# Altium PCB 06002479宁波2号线二期车载PIS系统_功率放大器功放板2  BHC-A-2030-04_PCB V1.0.PcbDoc (part 2 of 2)
Units mil, origin at the board's own origin, x right, y up, seen from the top; angles counter-clockwise.
Board outline 6377.95 x 3937.01 mil, 2 copper layers (Top Layer, Bottom Layer); 141 components, 101 nets, 406 pads, 71 vias.
Unrouted connection lines stored in the file: 3.
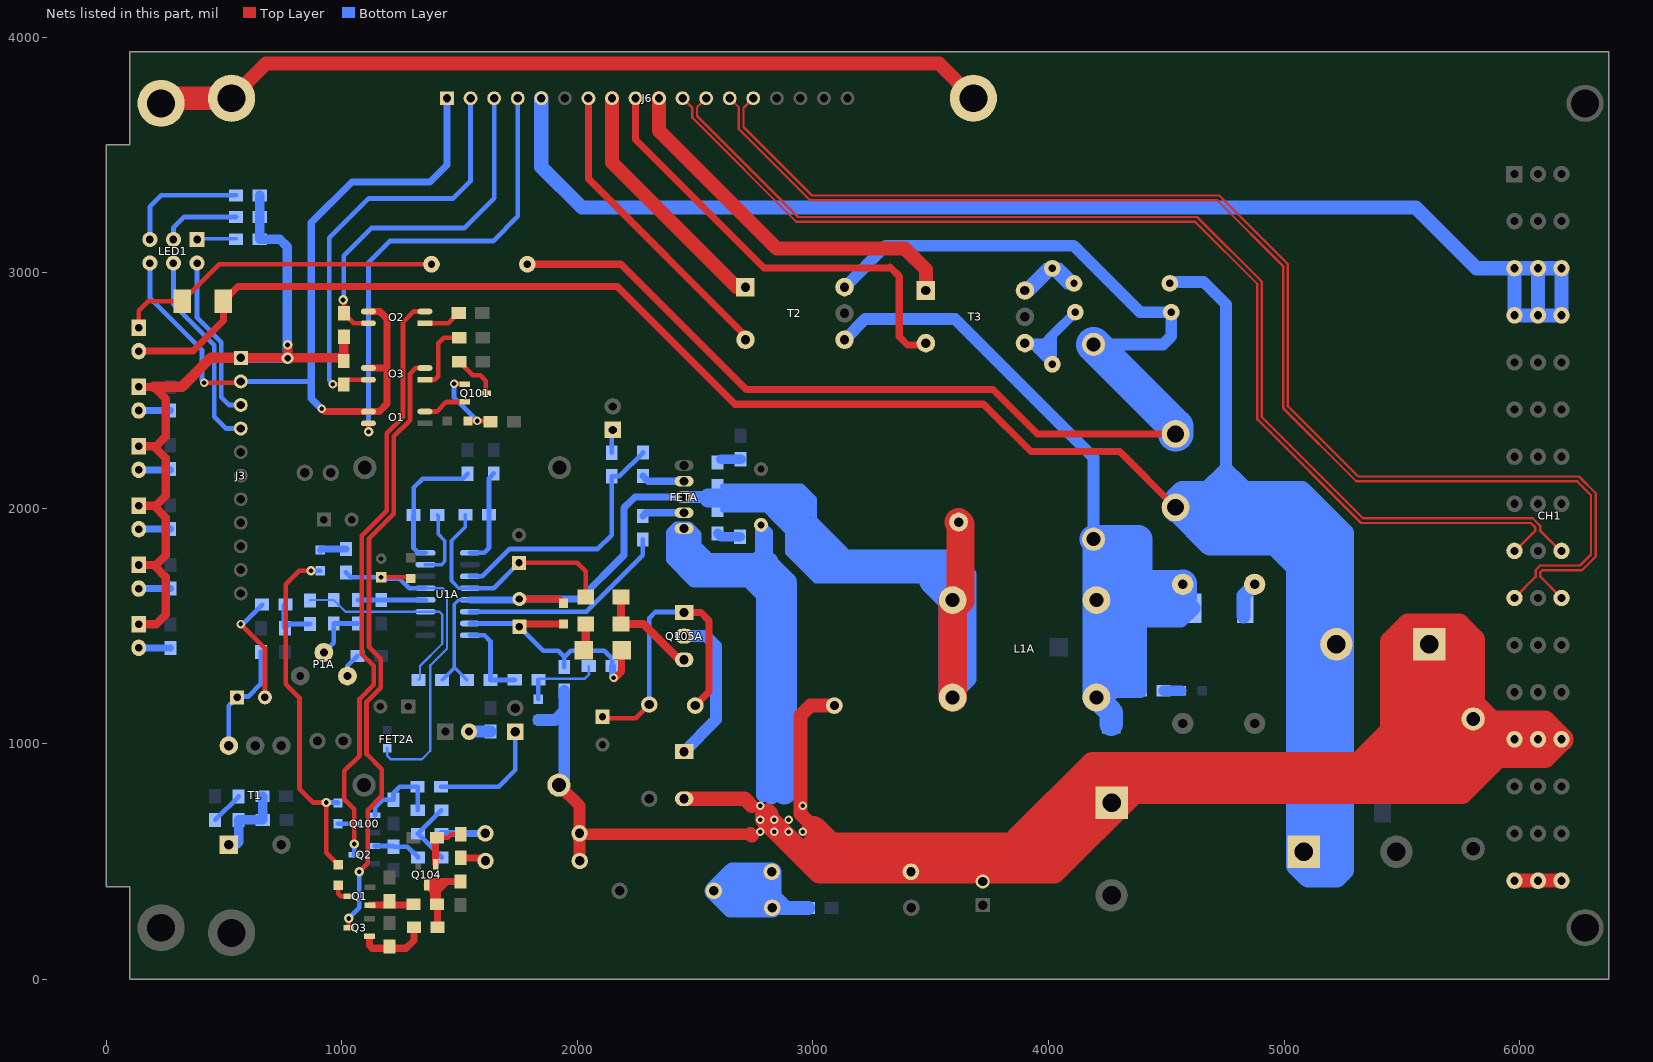
[diagram p2: the nets of this part, all layers, seen from the top]

## Via types
v1: diameter 40, hole 20, Top Layer to Bottom Layer, 48 vias
v2: diameter 36, hole 20, Top Layer to Bottom Layer, 19 vias
v3: diameter 50, hole 28, Top Layer to Bottom Layer, 3 vias
v4: diameter 30, hole 18, Top Layer to Bottom Layer, 1 vias

## Nets (pads, with @x,y where several pads share a name; then routed paths per layer and width w, separated by ;. In a path a pad name is that pad's centre, name@x,y a point inside that pad or via, vN(x,y) a via of type N, cw(c..) or ccw(c..) an arc to the next point about the centre after c; other vN are vias at no path point) (continued)
DC110V: C9A.2 C11A.2 CH1.B26 CH1.D26 CH1.Z26 CP8A.1 CP9.1 D4A.2 D5A.2 D22.1 FETA.5 J2.2 R17A.2 R114A.2 R115A.2 R116.2 R117A.2 R_1/2_1.2 Z100.2 Z101.2 | length 26253.6
  Top Layer w50: R117A.2@1921.2,824.26 2008.85,736.61 Z100.2@2008.85,619.27 Z101.2@2008.85,503.27 ; Z100.2@2012.76,615.35 2735.04,615.35 ; 3885.83,614.17 3993.59,614.17 3999.59,614.17 4003.73,618.31
  Top Layer w60: R114A.2@2452.76,766.14 2710.24,766.14 2740.16,736.22 ; 2735.04,615.35 2740.16,610.24 ; 3004.06,644 2947,701.06 2947,1120 2989,1162 R115A.2@3091,1162
  Top Layer w100: 2803.15,696.85 2803.15,681.1 3028.24,456.01 R_1/2_1.2@3415.98,456.01 ; 3003.94,572.01 3076.05,572.01 ; 3004.06,644 3076.05,572.01 ; 3018.13,526.01 3122.05,526.01 ; 3415.98,526.01 3122.05,526.01 ; R_1/2_1.2@3417.98,456.01 3944.43,456.01 ; 3494.43,526.01 3644.43,526.01 ; 4045,694 4126,775 ; CP8A.1@4206.92,718.51 3944.43,456.01 ; 3076.05,572.01 3644.43,572.01 ; 3076.05,572.01 3122.05,526.01 ; 3644.43,526.01 3644.43,572.01 ; 3644.43,526.01 3911.43,526.01 3999.59,614.17 4180.42,795 4362.2,795 ; 3644.43,572.01 3843.66,572.01 ; 3843.66,572.01 3885.83,614.17 4186.65,915 5318,915 5457,1054 5457,1130 ; 3843.66,572.01 3951.43,572.01 3993.59,614.17 4241.62,862.2 5302.8,862.2 5330,835 5529,1034 ; 3944.43,456.01 4023.21,456.01 4362.2,795 ; 4362.2,795 5395,795 ; 5395,795 5445.5,845.5 ; 5395,795 5496,795 ; 5445.5,845.5 5457,857 ; 5445.5,845.5 5434,857 5457,857 ; 5445.5,845.5 5496,795 ; 5457,857 5529,929 5529,1034 ; 5457,857 5667,857 5591,933 5591,1130 ; 5457,1130 5529,1130 ; 5457,1130 5529,1202 ; 5457,1130 5457,1433 5527,1503 5741,1503 5803,1441 5803,1358 ; 5496,795 5623,795 ; 5529,1034 5529,1130 ; 5529,1130 5529,1202 ; 5529,1130 5591,1130 ; 5529,1202 5583.5,1256.5 ; 5529,1202 5529,1379 ; 5529,1379 5529,1501 CP9.1@5618,1412 ; 5529,1379 5550,1358 CP9.1@5591,1358 ; 5583.5,1256.5 5568,1272 5591,1272 ; 5583.5,1256.5 5591,1249 ; 5583.5,1256.5 5591,1264 ; 5591,1130 5659,1130 ; 5591,1130 5591,1249 ; 5591,1249 5662,1178 ; 5591,1249 5591,1264 ; 5591,1264 5599,1272 ; 5591,1264 5591,1272 ; 5591,1272 CP9.1@5591,1358 ; 5591,1272 5599,1272 ; CP9.1@5591,1358 5731,1358 ; CP9.1@5591,1358 5591,1385 CP9.1@5618,1412 ; 5599,1272 5601,1274 5719,1274 ; 5599,1272 5717,1272 5719,1274 ; CP9.1@5618,1412 5723,1412 5731,1404 5731,1358 ; 5623,795 5731,795 ; 5623,795 5731,903 ; 5659,1130 5731,1058 ; 5659,1130 5659,975 5731,903 ; 5659,1130 5659,1175 5662,1178 ; 5659,1130 5710,1130 5662,1178 ; 5662,1178 5731,1247 ; 5719,1274 5731,1286 ; 5719,1274 5731,1274 ; 5731,795 5754.45,795 5906.89,947.44 ; 5731,795 5731,903 ; 5731,903 5731,1058 ; 5731,903 5777.93,903 5891.46,1016.54 ; 5731,1058 5772.46,1016.54 5891.46,1016.54 ; 5731,1058 5731,1247 ; 5731,1247 5731,1274 ; 5731,1274 5731,1286 ; 5731,1286 5731,1358 ; 5731,1286 5803,1358 ; 5731,1358 5803,1358 ; 5803,1169.29 5803,1358 ; 5803,1169.29 D22.1@5803,1105 5891.46,1016.54 ; 5803,1169.29 5881.74,1090.55 6105.91,1090.55 CH1.Z26@6177.95,1018.51 ; 5891.46,1016.54 CH1.D26@5975.99,1016.54 ; 5906.89,947.44 CH1.D26@5975.99,1016.54 ; 5906.89,947.44 6106.89,947.44 CH1.Z26@6175.99,1016.54 ; CH1.D26@5975.99,1016.54 CH1.Z26@6175.99,1016.54 ; CH1.D26@5975.99,1016.54 CH1.D26@5977.95,1018.51 CH1.B26@6077.95,1018.51 CH1.Z26@6177.95,1018.51 ; CH1.Z26@6175.99,1016.54 CH1.Z26@6177.95,1018.51 ; CH1.Z26@6175.99,1016.54 6177.95,1016.54 CH1.Z26@6177.95,1018.51
  Bottom Layer w40: C11A.2@2779.53,1929.13 2811.02,1897.64 2811.02,1788.41 2820.94,1778.5
  Bottom Layer w50: D4A.2@1833.82,1100.62 1905.2,1100.62 1943.8,1139.21 ; R117A.2@1921.2,824.26 1943.8,846.86 1943.8,1139.21 ; R17A.2@1943.8,1224.94 1943.8,1139.21 ; 2779.53,1778.5 C11A.2@2779.53,1929.13
  Bottom Layer w60: 2787.4,783.46 2787.4,1629.92 2724.41,1692.91 2496.06,1692.91 2405.51,1783.46 2405.51,1893.7 2425.2,1913.39 FETA.5@2452.76,1913.39 2468.5,1913.39 2496.06,1885.83 2496.06,1838.58 2556.15,1778.5 C9A.2@2690.36,1778.5 2779.53,1778.5 2785.76,1778.5 2820.94,1778.5 2820.94,1743.32 2820.94,1720.47 2820.94,876.06 2839.85,857.15 ; 2822.83,771.65 2839.85,788.67 2839.85,857.15 ; 2839.85,1724.41 2839.85,857.15
  Bottom Layer w70: R116.2@5532.83,1236 5532.83,1338.98 CP9.1@5615.85,1422
  Bottom Layer w80: D5A.2@4267,885.15 4267.43,884.72 CP8A.1@4267.43,749.86
  Bottom Layer w100: 2452.76,1858.27 2452.76,1842.52 2440.94,1830.71 2440.94,1818.9 2535.43,1724.41 2669.29,1724.41 2673.23,1720.47 2820.94,1720.47 ; 2785.76,1778.5 2820.94,1743.32 2839.85,1724.41 2881.89,1682.37 2881.89,899.19 ; 2839.85,857.15 2881.89,899.19 ; 2877.95,791.34 2881.89,795.28 2881.89,899.19
  other v2: 2775.59,625.98 2835.96,625.98 2896.33,625.98 2956.69,625.98 2775.59,677.17 2835.96,677.17 2896.33,677.17 2775.59,736.22 2956.69,736.22
DC+3.3V: J3.1 LED3.1 LED4.1 LED5.1 LED6.1 LED7.1 R67.2 R69.2 R72.2 R118.1 R121.1 | length 3806.7
  Top Layer w35: LED7.1@137.8,1506.69 211.42,1506.69 251.97,1547.24 251.97,1708.66 201.97,1758.66 LED6.1@137.8,1758.66 211.42,1758.66 251.97,1799.21 251.97,1960.63 201.97,2010.63 LED5.1@137.8,2010.63 211.42,2010.63 251.97,2051.18 251.97,2212.6 201.97,2262.6 LED4.1@137.8,2262.6 211.42,2262.6 251.97,2303.15 251.97,2464.57 201.97,2514.57 LED3.1@137.8,2514.57
  Top Layer w40: J3.1@570.87,2637.8 v3@769.39,2637.8 ; v3(769.39,2636.74) v3@769.39,2637.8 ; v1(769.39,2692.91) v3@769.39,2637.8 ; R118.1@1008.8,2727.33 1008.06,2726.59 1008.06,2650.91 R121.1@1008.06,2624.68 994.94,2637.8 v3@769.39,2637.8
  Top Layer w45: 201.97,2514.57 320,2514.57 443.23,2637.8 527.56,2637.8 J3.1@570.87,2637.8 ; R121.1@994.94,2637.8 R121.1@1008.06,2650.91
  Bottom Layer w40: J3.1@570.87,2637.8 571.92,2636.74 697.91,2636.74 ; R72.2@651.18,3141.73 736.22,3141.73 767.39,3110.57 v3@767.39,2636.74 ; R72.2@651.57,3144.47 R67.2@651.57,3327.47 ; v3(769.39,2636.74) v3@767.39,2636.74 ; 697.91,2636.74 v3@767.39,2636.74 ; 697.91,2636.74 696.85,2637.8 766.33,2637.8 v3@767.39,2636.74
DC+24V: CH1.B6 CH1.B8 CH1.D6 CH1.D8 CH1.Z6 CH1.Z8 J6.5 | length 5601.1
  Bottom Layer w60: J6.5@1846.46,3740.16 1846.46,3448.82 2019.69,3275.59 5559.05,3275.59 5816.14,3018.5 CH1.D6@5977.95,3018.5 ; CH1.D6@5977.95,3018.5 CH1.B6@6077.95,3018.5 ; CH1.D6@5977.95,3018.5 CH1.D8@5977.95,2818.51 CH1.B8@6077.95,2818.51 ; CH1.B8@6077.95,2818.51 CH1.Z8@6177.95,2818.51 CH1.Z6@6177.95,3018.5 CH1.B6@6077.95,3018.5 ; CH1.B8@6077.95,2818.51 CH1.B6@6077.95,3018.5
DGND: J3.2 J6.1 J6.8 J6.10 LED1.6 O1.3 O2.3 O3.3 T2.1 T3.1 | length 6326
  Top Layer w20: v2(415,2532) 565.07,2532 J3.2@570.87,2537.8 ; 1187.65,2595.01 1192,2595.01 1194.12,2595.01
  Top Layer w30: v2(914,2422) 925.99,2410.01 O1.3@1112.43,2410.01 1159.01,2410.01 1192,2443 1192,2595.01 1192,2804.01 1161,2835.01 O2.3@1112.43,2835.01 ; O3.3@1112.43,2595.01 1187.65,2595.01
  Top Layer w60: J6.8@2146.46,3740.16 2146.46,3467.72 2675.59,2938.58 T2.1@2713.39,2938.58 ; J6.10@2346.46,3740.16 2346.46,3602.36 2846.46,3102.36 3389.76,3102.36 3479.43,3012.7 T3.1@3479.43,2924.01
  Bottom Layer w20: LED1.6@185,3040.55 185,2894 406,2673 406,2542 416,2532 v2(415,2532) ; J3.2@570.87,2537.8 869.2,2537.8
  Bottom Layer w30: 869.2,2537.8 870,2537 ; v2(914,2422) 870,2466 870,2537 ; J6.1@1446.46,3740.16 1446.46,3457.46 1374,3385 1043,3385 870,3212 870,2537
EARTH: CH1.B32 CH1.D32 CH1.Z32 pad.8@232.28,3718.51 pad.8@531.5,3740.16 pad.8@3681.1,3740.16 | length 3779.4
  Top Layer w60: pad.8@531.5,3740.16 678.35,3887.01 3534.25,3887.01 pad.8@3681.1,3740.16 ; CH1.D32@5977.95,418.51 CH1.B32@6077.95,418.51 CH1.Z32@6177.95,418.51
  Top Layer w100: pad.8@232.28,3718.51 253.94,3740.16 pad.8@531.5,3740.16
I_SAMPLING: J6.7 T2.2 | length 1301.4
  Top Layer w30: J6.7@2046.46,3740.16 2046.46,3398.43 2713.39,2731.5 T2.2@2713.39,2714.96
LEDLINK: J3.4 LED1.4 | length 857.2
  Bottom Layer w20: LED1.4@285,3040.55 285,2865.49 458.39,2692.1 458.39,2388.74 509.33,2337.8 J3.4@570.87,2337.8
LEDSPEED: J3.3 LED1.2 | length 708.2
  Bottom Layer w20: LED1.2@385,3040.55 385,2807.92 488.39,2704.53 488.39,2471.74 522.33,2437.8 J3.3@570.87,2437.8
MB_RX_N: CH1.Z20 J6.14 | length 5433.4
  Top Layer w10: J6.14@2746.46,3740.16 2704.72,3698.43 2704.72,3618.11 2995.75,3327.09 4724.82,3327.09 5015.75,3036.16 5015.75,2433.07 5314.65,2134.17 6252.38,2134.17 6323.15,2063.4 6323.15,1794.87 6264.5,1736.22 6095.83,1736.22 6087.95,1728.35 6087.95,1708.51 CH1.Z20@6177.95,1618.51
MB_RX_P: CH1.D20 J6.13 | length 5432
  Top Layer w10: J6.13@2646.46,3740.16 2684.72,3701.89 2684.72,3609.83 2987.46,3307.09 4716.54,3307.09 4995.75,3027.87 4995.75,2424.79 5306.36,2114.17 6244.09,2114.17 6303.15,2055.12 6303.15,1803.15 6256.22,1756.22 6087.54,1756.22 6067.95,1736.63 6067.95,1708.51 CH1.D20@5977.95,1618.51
MB_TX_N: CH1.Z18 J6.12 | length 4874.3
  Top Layer w10: J6.12@2546.46,3740.16 2507.87,3701.57 2507.87,3665.35 2937.01,3236.22 4630.65,3236.22 4905.83,2961.04 4905.83,2386.24 5335.37,1956.69 6055.84,1956.69 6086.93,1925.61 6086.93,1905.51 6173.94,1818.51 CH1.Z18@6177.95,1818.51
MB_TX_P: CH1.D18 J6.11 | length 4873.5
  Top Layer w10: J6.11@2446.46,3740.16 2487.87,3698.74 2487.87,3657.07 2928.72,3216.22 4622.36,3216.22 4885.83,2952.76 4885.83,2377.95 5327.09,1936.69 6047.56,1936.69 6066.93,1917.32 6066.93,1905.51 5979.92,1818.51 CH1.D18@5977.95,1818.51
NetC1/2_2: C1/2.2 L1.2 R_1/2_1.1 R_1/2_2.2 | length 1393
  Bottom Layer w60: R_1/2_2.2@2825.43,304.46 R_1/2_2.2@2826.87,303.01 R_1/2_2.2@2826.87,303.01 2886.46,302.96 ; 2825.43,364 2886.46,302.96 ; C1/2.2@2978.79,302.96 2886.46,302.96
  Bottom Layer w80: 2706,423 2663,423 2622,382 2633,371 2740.42,371 R_1/2_1.1@2825.43,456.01 ; 2755.43,349.01 2825.43,419.01 ; R_1/2_2.2@2825.43,304.46 2825.43,364 2825.43,419.01 ; R_1/2_2.2@2826.87,303.01 2651.11,303.01 L1.2@2578.85,375.27 2659.59,456.01 R_1/2_1.1@2825.43,456.01 ; 2825.43,419.01 R_1/2_1.1@2825.43,456.01
NetC1_2: C1.2 Q1.1 R107.2 | length 186.9
  Top Layer w30: Q1.1@1119.14,314.87 1300.75,314.87 R107.2@1304.53,318.64
NetC2A_2: C2A.2 R2A.2 R7A.1 | length 215.5
  Bottom Layer w20: R2A.2@754.17,1589.64 754.17,1494.1 C2A.2@758.38,1489.9 776.31,1507.83 R7A.1@864.94,1507.83
NetC4_2: C4.2 R02.2 | length 140.6
  Bottom Layer w20: C4.2@461.9,676.63 462.52,676.63 R02.2@561.48,775.59
NetC4A_1: C4A.1 R7A.2 R8A.1 U1A.3 | length 907.4
  Bottom Layer w10: R7A.2@864.94,1607.83 866.95,1609.84 C4A.1@965.76,1609.84 1015.33,1560.26 U1A.3@1354.84,1560.26 1414.43,1560.26 1426.43,1548.26 1426.43,1424.26 1331.43,1329.26 1331.43,1276.42 R8A.1@1325.48,1270.47
NetC4A_2: C4A.2 C6A.1 P1A.2 | length 241.3
  Bottom Layer w20: P1A.2@923.62,1387.4 965.76,1429.54 C4A.2@965.76,1509.84 966.02,1510.1 C6A.1@1067.04,1510.1
NetC5_2: C5.2 R01.2 R02.1 T1.1 | length 308.5
  Bottom Layer w40: T1.1@552.85,573.27 561.48,581.9 R02.1@561.48,675.59 562.79,676.91 663.53,676.91 R01.2@663.53,776.9
NetC6A_2: C6A.2 C7A.2 U1A.4 | length 287.9
  Bottom Layer w20: C6A.2@1067.04,1610.1 C7A.2@1167.43,1610.1 1167.6,1610.26 U1A.4@1354.84,1610.26
NetC8A_2: C8A.2 R28A.1 | length 86.1
  Bottom Layer w40: R28A.1@2608.7,2206.76 C8A.2@2694.79,2206.76
NetC9A_1: C9A.1 R29A.2 | length 101.4
  Bottom Layer w40: R29A.2@2595.02,1893.07 2609.59,1878.5 C9A.1@2690.36,1878.5
NetC12A_2: C12A.2 D5A.1 D6A.2 L1A.2 R30A.2 R31A.2 R110.2 T2.5 | length 5726.3
  Bottom Layer w50: T2.5@3133.86,2714.96 3222.05,2803.15 3602.36,2803.15 4191,2214.51 R110.2@4191,1868.23
  Bottom Layer w60: 4267,1248 4290.37,1224.63 4346,1224.63 ; 4424,1655 4388.68,1619.68 ; 4346,1224.63 4346,1359 4346,1663.46 4380.77,1698.23 4452.94,1698.23 4474.62,1676.55 4531.5,1619.68 ; 4346,1224.63 R31A.2@4388.68,1224.63 4388.68,1523.62 ; 4388.68,1523.62 4388.68,1570.87 ; 4388.68,1523.62 4562.99,1523.62 R30A.2@4610.24,1570.87 ; 4388.68,1570.87 4388.68,1619.68 ; 4388.68,1570.87 R30A.2@4610.24,1570.87 ; 4388.68,1619.68 4531.5,1619.68 ; 4531.5,1619.68 4569.3,1619.68 R30A.2@4614.17,1574.8 R30A.2@4610.24,1570.87
  Bottom Layer w100: L1A.2@4203.24,1196 4267,1132.24 D5A.1@4267,1082
  Bottom Layer w120: L1A.2@4203.24,1196 L1A.2@4203.24,1609.39 4203.24,1855.99 R110.2@4191,1868.23 4265,1868.23 ; 4267,1248 4267,1866.23 4265,1868.23 ; 4346,1359 4353,1359 ; 4569.3,1619.68 C12A.2@4569.3,1676.55 ; C12A.2@4570,1676.55 C12A.2@4569.3,1676.55 ; C12A.2@4570,1679 4569.3,1679.7 C12A.2@4569.3,1676.55 ; 4265,1868.23 4380.77,1868.23 4380.77,1698.23 4424,1655 4445.55,1676.55 4474.62,1676.55 C12A.2@4569.3,1676.55
NetC13A_2: C13A.2 R30A.1 | length 155.3
  Bottom Layer w60: R30A.1@4827.24,1541 4827.24,1628.79 C13A.2@4875,1676.55
NetC100_2: C100.2 Q100.1 R1.1 R3.1 | length 366.4
  Bottom Layer w20: Q100.1@1141.14,696.67 1141.14,729.56 1173.49,761.91 C100.2@1218.8,761.91 1218.8,790.22 1246.22,817.64 R3.1@1321.17,817.64 1322.17,816.64 R1.1@1322.17,717.64
NetC101_2: C101.2 Q2.1 R2.2 | length 207.5
  Bottom Layer w20: Q2.1@1142.9,562.91 Q2.1@1140.14,565.67 1218.04,565.67 1220.8,562.91 1277.52,562.91 R2.2@1323.53,516.9
NetC102_2: C102.2 Q3.1 R108.2 | length 288
  Top Layer w30: 1116.85,168.27 1116.85,143.27 1128.49,131.63 1201.8,131.63 1272.21,131.63 1305.53,164.94 R108.2@1305.53,220.64
NetCP1A_2: CP1A.2 R2A.1 | length 477.9
  Top Layer w20: v2(571,1508) 673.23,1405.77 CP1A.2@673.23,1196.85
  Bottom Layer w20: v2(571,1508) 578.95,1508 R2A.1@661.32,1590.37
NetCP3A_1: CP3A.1 D7A.2 FET2A.2 R3A.1 U1A.5 | length 1543.8
  Top Layer w20: CP3A.1@1157.01,1697.47 CP3A.1@1166.43,1706.89 1286.43,1706.89 D7A.2@1291.85,1701.47
  Bottom Layer w10: FET2A.2@1191.91,981.2 1191.91,950.2 1208.85,933.27 1338.85,933.27 1375.43,969.84 1375.43,1332.26 1446.43,1403.26 1446.43,1643.26 1429.43,1660.26 U1A.5@1354.84,1660.26
  Bottom Layer w20: R3A.1@1017.5,1726.33 1036.95,1706.89 CP3A.1@1166.43,1706.89 1172.06,1701.26 1244.43,1701.26 1285.43,1660.26 U1A.5@1354.84,1660.26
NetCP5A_1: CP5A.1 R21A.1 R26A.2 U1A.12 | length 1057
  Top Layer w20: CP5A.1@1751.97,1767.72 2000,1767.72 2035.43,1732.28 R21A.1@2035.43,1622.05
  Bottom Layer w15: R26A.2@1524.64,1971.51 1524.64,1920.47 1465.43,1861.26 1465.43,1691.26 1496.43,1660.26 U1A.12@1543.82,1660.26
  Bottom Layer w20: U1A.12@1543.82,1660.26 1644.51,1660.26 CP5A.1@1751.97,1767.72
NetCP6A_1: CP6A.1 D3A.2 R17A.1 R22A.1 U1A.15 Z105A.2 | length 1147.9
  Top Layer w30: CP6A.1@1753.43,1496.26 1764.64,1507.47 1940.54,1507.47 Z105A.2@1940.94,1507.87 ; v2(2153.54,1279.53) 2157.48,1275.59 2187.56,1305.67 D3A.2@2187.56,1397.64
  Bottom Layer w20: U1A.15@1543.82,1510.26 1739.43,1510.26 CP6A.1@1753.43,1496.26 1855.43,1394.26 1918.43,1394.26 1943.8,1368.89 1943.8,1366.63 ; R17A.1@1943.8,1324.94 1943.8,1366.63 ; R22A.1@2148.1,1329.89 2148.1,1360.59 2114.43,1394.26 1971.43,1394.26 1943.8,1366.63
  Bottom Layer w30: R22A.1@2148.1,1329.89 2148.1,1284.97 v2(2153.54,1279.53)
NetCP6A_2: CP6A.2 FETA.3 L1A.1 R8A.2 R19A.2 R28A.2 R29A.1 TP1.1 U1A.13 Z105A.1 | length 9390.3
  Top Layer w30: CP6A.2@1753.43,1614.37 1921.44,1614.37 1940.54,1595.27 Z105A.1@1940.94,1595.67
  Top Layer w120: L1A.1@3593,1196 L1A.1@3593,1609.39 3625.98,1609.39 3625.98,1933.07 TP1.1@3618.11,1940.94
  Bottom Layer w15: R8A.2@1425.48,1270.47 1476.43,1321.42 1476.43,1324.84 ; R19A.2@1530.54,1270.72 1476.43,1324.84 ; U1A.13@1543.82,1610.26 1495.43,1610.26 1476.43,1591.26 1476.43,1324.84
  Bottom Layer w25: R29A.1@2618.64,1993.94 2619.51,1993.07 2822.83,1993.07 ; R28A.2@2618.64,2093.07 2950,2093.07 3004.94,2038.13 3004.94,1953.13 3147.05,1811.02 3590.55,1811.02 3641.73,1759.84 ; 2869,1993.07 2838.58,1993.07 2822.83,1993.07 ; 3509.47,1692.91 3011.81,1692.91 2893.7,1811.02 2893.7,1922.21 2822.83,1993.07 ; L1A.1@3593,1609.39 3625.35,1641.73 3641.73,1658.12 3641.73,1759.84 ; 3669.29,1720.47 3669.29,1732.28 3641.73,1759.84
  Bottom Layer w30: U1A.13@1543.82,1610.26 1749.31,1610.26 ccw(c1749.31,1614.37) CP6A.2@1753.43,1614.37 2011.37,1614.37 2196.85,1799.85 2196.85,2000 2244.09,2047.24 FETA.3@2452.76,2047.24
  Bottom Layer w45: 2562.04,2043.51 2562.04,2047.24
  Bottom Layer w50: FETA.3@2452.76,2047.24 2562.04,2047.24 2622.25,2047.24 2625.98,2043.51 ; L1A.1@3593,1196 3669.29,1272.29 3669.29,1720.47
  Bottom Layer w80: 2555.13,2043.51 2562.04,2043.51 2625.98,2043.51 2790,2043.51 ; 2968.5,1996.06 2968.5,2000 ; 2972.44,2003.94 2932.87,2043.51 ; 3509.47,1692.91 3474.04,1728.35 3133.86,1728.35 ; L1A.1@3625.35,1641.73 3625.35,1669.93 ; 2790,2043.51 2838.58,1994.92 2838.58,1993.07 2877.95,1953.7 ; 2790,2043.51 2877.95,2043.51 ; 2877.95,1953.7 2877.95,2043.51 ; 2877.95,1953.7 2925.2,1906.46 ; 2877.95,2043.51 2932.87,2043.51 ; 2925.2,1906.46 2925.2,2035.83 2932.87,2043.51 ; 2925.2,1906.46 2925.2,1830.71 3011.81,1744.09 3027.56,1728.35 3133.86,1728.35 ; 3133.86,1728.35 3161.42,1755.91 ; 3133.86,1728.35 3047.24,1814.96 3019.69,1814.96 2972.44,1862.2 2972.44,1921.26 2996.06,1921.26 3161.42,1755.91 ; 3161.42,1755.91 3188.98,1783.46 3511.81,1783.46 ; 3511.81,1783.46 3555.12,1783.46 3625.35,1713.24 3625.35,1669.93 ; 3511.81,1783.46 3625.35,1669.93
  Bottom Layer w120: 3509.47,1692.91 L1A.1@3593,1609.39 L1A.1@3593,1196
NetCP9_2: CP9.2 CP10.1 D12.A J4.2 LED2.2 R115.1 R116.1 R117.2 | length 17116.4
  Top Layer w30: LED2.2@137.8,2666.54 367.32,2666.54 496.7,2795.91 D12.A@496.7,2878.46 559.18,2940.94 2169.29,2940.94 2669.29,2440.94 3724.41,2440.94 3925.2,2240.16 4302.36,2240.16 J4.2@4539.37,2003.15
  Bottom Layer w50: R115.1@4526.43,2960.01 4658.43,2960.01 4753.43,2865.01 4753.43,2174.01 ; 4655.43,2076.01 4753.43,2174.01 ; 4753.43,2084.01 4753.43,2174.01 ; 4817.43,2076.01 4817.43,2110.01 ; 4913.43,2030.01 4897.43,2030.01 4851.43,2076.01 4817.43,2110.01 ; 4753.43,2174.01 4817.43,2110.01
  Bottom Layer w80: J4.2@4531.43,1982.2 J4.2@4538.99,1982.2 ; J4.2@4531.43,2041.01 4566.43,2076.01 4655.43,2076.01 4817.43,2076.01 4851.43,2076.01 5074.99,2076.01 5257,1894 5257,462 5224,429 5174,429 ; 4967.43,1964.01 4888.43,1964.01 ; CP10.1@5083.15,541 CP10.1@5122,579.85 ; 5203,458 5174,429 ; 5203,991 5122,910 ; J4.2@4538.99,1982.2 4683.19,1838 4777.2,1838 ; J4.2@4538.99,1982.2 4528,1993.19 4693.81,1993.19 ; J4.2@4538.99,1982.2 4633,1982.2 ; 4633,1982.2 4777.2,1838 ; 4633,1982.2 4704.8,1982.2 ; 4693.81,1993.19 4969.81,1993.19 ; 4693.81,1993.19 4704.8,1982.2 ; 4704.8,1982.2 4870.24,1982.2 4888.43,1964.01 ; 4704.8,1982.2 4722.99,1964.01 ; 4722.99,1964.01 4799.28,1887.72 4964.72,1887.72 ; 4722.99,1964.01 4888.43,1964.01 ; 4777.2,1838 4959,1838 ; 4888.43,1964.01 4964.72,1887.72 ; 4959,1838 5048,1749 ; 4959,1838 5014.43,1838 ; 4964.72,1887.72 5014.43,1838 ; 4969.81,1993.19 5073.81,1993.19 5203,1864 5203,1760 ; 4969.81,1993.19 4980.8,1982.2 5203,1760 ; 5014.43,1838 5048,1804.43 ; 5048,1749 5048,1804.43 ; 5048,1749 5048,482 5101,429 ; 5048,1804.43 5122,1730.43 5122,1662 ; 5101,429 5174,429 ; 5101,429 5122,450 CP10.1@5122,579.85 ; CP10.1@5122,579.85 5122,910 ; 5122,910 5122,1662 ; 5122,1662 5203,1743 5203,1760
  Bottom Layer w100: J4.2@4579.24,2030.01 4897.43,2030.01 ; 4870.24,1982.2 4980.8,1982.2 5084.43,1982.2 ; 4913.43,2030.01 5057.43,2030.01 ; 5203,458 5203,991 5203,1743
NetCP101A_1: CP101A.1 Q105A.1 R115A.1 Z102A.2 | length 1256.4
  Top Layer w20: CP101A.1@2106.3,1114.17 2112.2,1108.27 2246.85,1108.27 Z102A.2@2304.85,1166.27
  Top Layer w30: Q105A.1@2452.76,1556.69 2524.31,1556.69 2559,1522 2559,1385 2559,1220.55 R115A.1@2500.45,1162
  Bottom Layer w20: Z102A.2@2304.85,1166.27 2304.85,1533.2 2330.71,1559.06 2450.39,1559.06 Q105A.1@2452.76,1556.69
NetCSD1A_2: CSD1A.2 R14A.1 | length 91.8
  Bottom Layer w50: CSD1A.2@1539.85,1051.27 1631.16,1051.27 R14A.1@1631.48,1051.59
NetD1_2: D1.2 Q1.3 | length 85.5
  Top Layer w20: D1.2@984.85,398.47 984.85,363.27 995.85,352.27 Q1.3@1030.56,352.27
NetD1A_1: D1A.1 R3A.2 | length 110.6
  Bottom Layer w30: D1A.1@908.62,1822.27 912.69,1826.33 R3A.2@1017.5,1826.33
NetD2_2: D2.2 Q100.3 | length 69.2
  Bottom Layer w20: D2.2@983.85,660.47 1051.35,660.47 Q100.3@1052.56,659.27
NetD3A_1: D3A.1 R20A.1 | length 113.5
  Top Layer w35: D3A.1@2027.56,1397.64 2035.43,1405.51 R20A.1@2035.43,1507.87
NetD4A_1: D4A.1 R18A.2 R22A.2 | length 344.2
  Bottom Layer w10: R18A.2@1833.95,1271.46 1837.75,1275.26 2030.43,1275.26 2049.43,1294.26 2048.1,1295.59 R22A.2@2048.1,1329.89
  Bottom Layer w20: D4A.1@1833.82,1188.41 1833.95,1188.54 R18A.2@1833.95,1271.46
NetD12_K: D12.K LED2.1 R52.1 | length 1396.2
  Top Layer w20: LED2.1@137.8,2766.54 137.8,2838.58 177.67,2878.46 D12.K@321.7,2878.46 478.67,3035.43 R52.1@1380.4,3035.43
NetDg1_2: Dg1.2 Q101.1 Rg.2 | length 341.7
  Top Layer w20: v2(1476.38,2527.56) 1520.46,2527.56 Q101.1@1522.25,2525.77 ; Dg1.2@1535.43,2370.08 v2(1574.8,2370.08) 1627.21,2370.08 Rg.2@1630.78,2366.51
  Bottom Layer w20: v2(1476.38,2527.56) 1476.38,2468.5 v2(1574.8,2370.08)
NetFETA_2: FETA.2 R25A.2 | length 183.3
  Bottom Layer w30: R25A.2@2278.48,2135.88 2300.19,2114.17 FETA.2@2452.76,2114.17
NetFETA_4: FETA.4 R24A.2 | length 180.7
  Bottom Layer w30: R24A.2@2277.74,1966.53 2291.52,1980.31 FETA.4@2452.76,1980.31
NetJ1_1: J1.1 R3.2 | length 506.9
  Bottom Layer w20: R3.2@1421.17,817.64 1665.22,817.64 1735.85,888.27 J1.1@1735.85,1051.27
NetJ4_1: J4.1 R52.2 R110.1 R114.1 T2.3 | length 5598.2
  Top Layer w30: R52.2@1787.4,3035.43 2185.04,3035.43 2716.54,2503.94 3763.78,2503.94 3952.76,2314.96 J4.1@4539.37,2314.96
  Bottom Layer w50: T2.3@3133.86,2938.58 3309.45,3114.17 4106.3,3114.17 4388.47,2832 R114.1@4521,2832 4521,2729.66 4486.34,2695 R110.1@4191,2695
  Bottom Layer w150: R110.1@4191,2695 4539.37,2346.63 J4.1@4539.37,2314.96
NetLED1_1: LED1.1 R72.1 | length 166.6
  Bottom Layer w15: LED1.1@385,3144.47 R72.1@551.57,3144.47
NetLED1_3: LED1.3 R69.1 | length 394.1
  Bottom Layer w20: LED1.3@285,3140.55 285,3190.51 330.72,3236.24 ; 389.76,3236.24 330.72,3236.24 ; R69.1@551.13,3236.24 330.72,3236.24
NetLED1_5: LED1.5 R67.1 | length 525.1
  Bottom Layer w20: LED1.5@185,3140.55 185,3279.49 233.24,3327.73 R67.1@551.18,3327.73
NetLED1A_1: LED1A.1 R23A.2 | length 98.3
  Bottom Layer w20: R23A.2@2145.3,2235.36 2145.3,2327.58 LED1A.1@2149.61,2331.89
NetLED3_2: LED3.2 R77.1 | length 133.9
  Bottom Layer w30: LED3.2@137.8,2414.57 R77.1@271.7,2414.57
NetLED4_2: LED4.2 R90.1 | length 133.9
  Bottom Layer w30: LED4.2@137.8,2162.6 R90.1@271.7,2162.6
NetLED5_2: LED5.2 R100.1 | length 133.9
  Bottom Layer w30: LED5.2@137.8,1910.63 R100.1@271.7,1910.63
NetLED6_2: LED6.2 R82.2 | length 133.9
  Bottom Layer w30: LED6.2@137.8,1658.66 R82.2@271.7,1658.66
NetLED7_2: LED7.2 R73.2 | length 134.4
  Bottom Layer w30: LED7.2@137.8,1406.69 138.12,1406.37 R73.2@272.02,1406.37
NetO1_2: O1.2 Q101.2 | length 186.8
  Top Layer w20: O1.2@1352.43,2410.01 1402.13,2410.01 1443.09,2450.97 Q101.2@1522.25,2450.97
NetO2_1: O2.1 R119.2 | length 161.8
  Top Layer w20: O2.1@1352.43,2785.01 1452.31,2785.01 R119.2@1496.1,2828.8
NetO2_2: O2.2 Q2.3 | length 2535.9
  Top Layer w20: v1(1052.85,574.27) 1052.85,721.27 1009.85,764.27 1009.85,884.27 1074.85,949.27 1074.85,1189.69 1134.85,1249.69 1134.85,1330.27 1084.85,1380.27 1084.85,1882.85 1190,1988 1190,2020 1190,2317 1259.43,2386.43 1259.43,2789.01 1305.43,2835.01 O2.2@1352.43,2835.01
  Bottom Layer w20: Q2.3@1051.56,528.27 1052.85,529.56 v1(1052.85,574.27)
NetO3_1: O3.1 R122.2 | length 301.8
  Top Layer w20: O3.1@1352.43,2545.01 1393.7,2545.01 1409.45,2560.76 1409.45,2700.79 1432.46,2723.8 R122.2@1498.1,2723.8
NetO3_2: O3.2 Q3.3 | length 2697
  Top Layer w20: Q3.3@1028.56,219.27 1028.56,257.98 v1(1028.85,258.27) ; v1(1073.85,456.27) 1109.85,492.27 1109.85,718.27 1169.85,778.27 1169.85,891.27 1104.85,956.27 1104.85,1177.27 1164.85,1237.27 1164.85,1361.27 1114.85,1411.27 1114.85,1829.27 1114.85,1870.42 1220,1975.57 1220,2304.57 1289.43,2374 ; 1289.43,2443 1289.43,2374 ; O3.2@1352.43,2595.01 1313.43,2595.01 1289.43,2571.01 1289.43,2374
  Bottom Layer w20: v1(1028.85,258.27) 1073.85,303.27 v1(1073.85,456.27)
NetP1A_3: P1A.3 R11A.1 | length 101.9
  Bottom Layer w20: P1A.3@1023.62,1287.4 1023.62,1329.84 R11A.1@1065.64,1371.85
NetQ101_3: Q101.3 Rs.2 | length 198.9
  Top Layer w20: Rs.2@1498.1,2621.8 1555.53,2564.37 1566.54,2564.37 1587.54,2564.37 1610.83,2541.08 Q101.3@1610.83,2488.37
NetQ104_1: Q104.1 R112.2 R113.1 | length 220.6
  Top Layer w20: R113.1@1398.25,594.36 R113.1@1404.53,600.64 1405.16,601.27 1449.85,601.27 1464.17,615.59 R112.2@1504.22,615.59
  Top Layer w30: Q104.1@1398.25,488.56 R113.1@1398.25,594.36
NetQ104_3: Q104.3 R107.1 R108.1 R111.2 | length 564.6
  Top Layer w30: R107.1@1404.53,318.64 1404.53,334.59 1389.85,349.27 1389.85,370.98 Q104.3@1360.85,399.98 ; R108.1@1405.53,220.64 1405.53,374.59 ; R111.2@1503.22,415.59 1446.53,415.59 ; Q104.3@1360.85,399.98 1376.47,415.59 1422.85,415.59 ; Q104.3@1360.85,399.98 1380.14,399.98 ; 1380.14,399.98 1407.24,399.98 1422.85,415.59 ; 1380.14,399.98 1405.53,374.59 ; 1405.53,374.59 1446.53,415.59 ; 1422.85,415.59 1446.53,415.59
NetQ105A_2: Q105A.2 R114A.1 | length 657.4
  Bottom Layer w50: R114A.1@2452.76,966.14 2588,1101.39 2588,1415 2546.31,1456.69 Q105A.2@2452.76,1456.69
NetR1_2: R1.2 R2.1 R106.2 | length 283
  Bottom Layer w20: R1.2@1422.17,717.64 1323.53,618.99 R106.2@1323.53,617.9 1323.53,616.9 R2.1@1423.53,516.9
NetR12A_2: R12A.2 R13A.1 U1A.8 | length 569.1
  Bottom Layer w20: U1A.8@1354.84,1810.26 1324.43,1810.26 1304.43,1830.26 1304.43,1970.87 R13A.1@1304.81,1971.26 1304.81,2087.65 1342.43,2125.26 1512.34,2125.26 R12A.2@1533.34,2146.26
NetR13A_2: R13A.2 U1A.7 | length 298.9
  Bottom Layer w15: U1A.7@1354.84,1760.26 1423.43,1760.26 1437.43,1774.26 1437.43,1861.26 1408.43,1890.26 1408.43,1967.65 R13A.2@1404.81,1971.26
NetR18A_1: R18A.1 R19A.1 U1A.16 | length 365.3
  Bottom Layer w20: U1A.16@1543.82,1460.26 1605.43,1460.26 1630.54,1435.14 R19A.1@1630.54,1270.72 1733.21,1270.72 R18A.1@1733.95,1271.46
NetR23A_1: R23A.1 R25A.1 U1A.11 | length 1098.8
  Bottom Layer w20: U1A.11@1543.82,1710.26 1596.09,1710.26 1712.6,1826.77 2086.61,1826.77 2145.3,1885.46 R23A.1@2145.3,2135.36 2177.96,2135.36 R25A.1@2278.48,2235.88
NetR24A_1: R24A.1 U1A.14 | length 899.9
  Bottom Layer w20: U1A.14@1543.82,1560.26 2038.26,1560.26 2277.74,1799.74 R24A.1@2277.74,1866.53
NetR26A_1: R26A.1 R27A.2 U1A.9 | length 414.3
  Bottom Layer w20: U1A.9@1543.82,1810.26 1603.43,1810.26 1625.43,1832.26 1624.64,1833.05 R26A.1@1624.64,1971.51 1624.64,2127.32 R27A.2@1644.56,2147.24
NetR31A_1: R31A.1 Z108.2 | length 75.7
  Bottom Layer w45: R31A.1@4488.68,1224.63 4489.05,1225 Z108.2@4564.2,1225
NetR106_1: R106.1 Z100.1 | length 185.9
  Bottom Layer w30: R106.1@1423.53,617.9 1424.9,619.27 Z100.1@1608.85,619.27
NetR112_1: R112.1 Z101.1 | length 111.1
  Top Layer w30: R112.1@1504.22,515.59 1596.53,515.59 Z101.1@1609.85,502.27
NetR114_2: R114.2 R120.1 T3.5 | length 566.6
  Bottom Layer w40: T3.5@3899.9,2700.39 T3.5@3927.05,2700.39 ; R114.2@4114,2832 4016.43,2734.43 ; T3.5@3927.05,2700.39 R120.1@4016.43,2611.01 4016.43,2666.35 ; T3.5@3927.05,2700.39 3956,2700.39 3982.39,2700.39 ; 3982.39,2700.39 4016.43,2666.35 ; 3982.39,2700.39 4016.43,2734.43 ; 4016.43,2666.35 4016.43,2734.43
NetR115_2: R115.2 R120.2 T3.3 | length 616.2
  Bottom Layer w50: T3.3@3897,2921 T3.3@3900.01,2924.01 ; T3.3@3900.01,2924.01 T3.3@3899.9,2924.01 3993.9,3018.01 R120.2@4016.43,3018.01 ; T3.3@3900.01,2924.01 3922.43,2924.01 3952.42,2954 ; T3.3@3900.01,2924.01 3930,2954 3952.42,2954 ; 3952.42,2954 R120.2@4016.43,3018.01 ; R120.2@4016.43,3018.01 4043.99,3018.01 R115.2@4108,2954 4080.43,2954 R120.2@4016.43,3018.01
OVP_CPU: J6.3 O2.4 R118.2 | length 1539.8
  Top Layer w20: v1(1005,2884) 1008.8,2880.2 R118.2@1008.8,2827.33 1051.12,2785.01 O2.4@1112.43,2785.01
  Bottom Layer w20: v1(1005,2884) 1007,2882 1010,2882 1008,2884 1008,3071.78 1046.46,3110.24 1125.2,3188.98 1519.69,3188.98 1646.46,3315.75 J6.3@1646.46,3740.16
PA_STATE_CPU: J6.4 O1.4 | length 1969.8
  Top Layer w20: O1.4@1112.43,2360.01 1112.43,2325.7 v1(1113.39,2324.74)
  Bottom Layer w20: v1(1113.39,2324.74) 1113.39,3043.31 1203.94,3133.86 1641.73,3133.86 1746.46,3238.58 J6.4@1746.46,3740.16
RCA: CP1A.1 R1A.2 T1.3 | length 480.6
  Bottom Layer w20: T1.3@519.85,991.74 519.85,1161.58 CP1A.1@555.12,1196.85 558.54,1200.27 602.85,1200.27 656.22,1253.64 R1A.2@656.22,1389.94
SD: D1.1 D1A.2 D2.1 | length 1536.9
  Top Layer w20: v1(868.85,1734.27) 819.85,1734.27 761.85,1676.27 761.85,1253.27 819.85,1195.27 819.85,808.27 877.85,750.27 v1(933.85,750.27) 933.85,537.27 D1.1@984.85,486.27
  Bottom Layer w20: v1(868.85,1734.27) 908.42,1734.27 D1A.2@908.62,1734.47 ; v1(933.85,750.27) 981.85,750.27 D2.1@983.85,748.27
UVP_CPU: J6.2 O3.4 R121.2 | length 1839
  Top Layer w20: v2(961,2526) 1006.74,2526 R121.2@1008.06,2524.68 1028.38,2545.01 O3.4@1112.43,2545.01
  Bottom Layer w20: v2(961,2526) 961,2529 946.46,2543.54 946.46,3147.24 1114.17,3314.96 1472.44,3314.96 1546.46,3388.98 J6.2@1546.46,3740.16
V_SAMPLING: J6.9 T3.2 | length 1925.9
  Top Layer w30: J6.9@2246.46,3740.16 2246.46,3564.57 2791.34,3019.68 3322.83,3019.68 3326.77,3023.62 3366.14,2984.25 3366.14,2728.35 3401.57,2692.91 3471.95,2692.91 T3.2@3479.43,2700.39
VCC_A: Q105A.3 R20A.2 R21A.2 | length 444.5
  Top Layer w35: R21A.2@2185.04,1622.05 R20A.2@2185.04,1507.87 2279.53,1507.87 2430.71,1356.69 Q105A.3@2452.76,1356.69
pads on no net: CH1.0 CH1.8 CH1.B12 CH1.B14 CH1.B16 CH1.B18 CH1.B20 CH1.B22 CH1.B24 CH1.B28 CH1.D14 CH1.D16 CH1.D22 CH1.D24 CH1.D28 CH1.Z12 CH1.Z14 CH1.Z16 CH1.Z22 CH1.Z24 CH1.Z28 P1A.1 T1.4 T2.4 T3.4

## Polygon pours and split planes (outlines as drawn)
"ANALOG GND" on Bottom Layer "Top Layer-No Net" (hatched 90Degree grid 8 track 20, remove dead copper, pour order 6): 787.4,118.11 708.66,196.85 708.66,354.33 511.81,551.18 511.81,1417.32 511.81,1496.06 629.92,1614.17 708.66,1692.91 708.66,2125.98 866.14,2283.46 944.88,2283.46 1684.7,2283.46 1850.39,2117.77 1850.39,472.44 1929.13,393.7 2204.72,393.7 2244.09,354.33 2244.09,157.48 2204.72,118.11
"ANALOG GND" on Bottom Layer "Top Layer-No Net" (hatched 90Degree grid 8 track 20, remove dead copper, pour order 8): 2244.09,354.33 2244.09,511.81 2204.72,551.18 2125.98,551.18 2086.61,511.81 2086.61,433.07 2007.87,354.33
"ANALOG GND" on Top Layer "Top Layer-No Net" (hatched 90Degree grid 8 track 20, remove dead copper, pour order 5): 787.4,118.11 708.66,196.85 708.66,354.33 511.81,551.18 511.81,1417.32 511.81,1496.06 629.92,1614.17 708.66,1692.91 708.66,2125.98 866.14,2283.46 944.88,2283.46 1684.7,2283.46 1850.39,2117.77 1850.39,472.44 1929.13,393.7 2204.72,393.7 2244.09,354.33 2244.09,157.48 2204.72,118.11
"ANALOG GND" on Top Layer "Top Layer-No Net" (hatched 90Degree grid 8 track 20, remove dead copper, pour order 7): 2244.09,354.33 2244.09,511.81 2204.72,551.18 2125.98,551.18 2086.61,511.81 2086.61,433.07 2047.24,393.7

## Keep-outs
Keep-Out Layer:
  the board outline again, w20

## Other copper
Top Layer:
  rectangle net DC110V: 2724.41,566.93 2984.25,795.28
Bottom Layer:
  rectangle net DC110V: 2724.41,566.93 2984.25,795.28

## Silkscreen, mask and mechanical layers (free items; w line width, h text height)
Top Overlay:
  circle w5: c768,2357 r35.38
  lines w5: 0,472.44 0,0 216.54,0 ; 49.21,2716.54 137.8,2716.54 210.32,2716.54 ; 51.18,2464.57 137.8,2464.57 204.72,2464.57 ; 70.87,2212.6 137.8,2212.6 212.6,2212.6 ; 86.61,1708.66 137.8,1708.66 192.91,1708.66 ; 98.43,393.7 393.7,393.7 393.7,0 ; 98.43,3543.31 393.7,3543.31 ; 102.36,1960.63 137.8,1960.63 200.79,1960.63 ; 106.3,1456.69 137.8,1456.69 177.17,1456.69 ; 393.7,3858.27 393.7,3543.31 ; 393.7,3543.31 393.7,3543.31
  lines w6: 1553.81,481 1563.81,481 1628.81,416 1628.81,291 ; 953.24,461.76 984,431 986,431 1016.76,461.76 953.24,461.76
  lines w8: -137.8,0 137.8,0 ; 0,-137.79 0,393.7 ; 6186.1,3718.51 6281.1,3718.51 ; 6281.1,218.51 6381.1,218.51 ; 6281.1,3626.51 6281.1,3718.51 ; 6281.1,3802.51 6281.1,3718.51 ; 6418.1,3718.51 6281.1,3718.51
  lines w10: 6357.95,60 6377.95,0 ; 6357.95,1908.5 6377.95,1968.5 ; 6357.95,2028.5 6377.95,1968.5 ; 6357.95,3877.01 6377.95,3937.01 ; 6367.95,0 6387.95,0 ; 6367.95,3937.01 6387.95,3937.01 ; 6377.95,593.37 6377.95,0 ; 6377.95,1375.13 6377.95,1968.5 ; 6377.95,2561.88 6377.95,1968.5 ; 6377.95,3343.63 6377.95,3937.01 ; 6397.95,60 6377.95,0 ; 6397.95,1908.5 6377.95,1968.5 ; 6397.95,2028.5 6377.95,1968.5 ; 6397.95,3877.01 6377.95,3937.01 ; 6367.95,1968.5 6387.95,1968.5 6367.95,1968.5
  text "下   中   上" at 200.79,3204.72 h40
  text "BHC-A-2030-04 V1.0" at 5015.75,3003.94 h80
  text "1968.504 (mil)" at 6413.94,2571.88 h60 r90
  text "Analog GND" at 681,2403 h30
  text "1968.504 (mil)" at 6413.94,603.37 h60 r90
Bottom Overlay:
  lines w5: 3360.57,757.74 3360.92,757.74
  lines w6: 511.81,1894 755.81,1894 780.81,1869 780.81,1724 835.81,1669 1210.81,1669 ; 867.81,617 1015.81,617 1032.81,634 1056.81,634
  lines w10: 1161.42,421.26 1149.61,421.26 1118.11,389.76 1118.11,275.59 1133.86,259.84 1141.73,259.84 1299.21,259.84 1307.09,251.97 1307.09,208.66 1311.02,204.72 1460.63,204.72 1480.31,224.41 1480.31,870.08 1472.44,877.95 1271.65,877.95 1259.84,866.14 1259.84,830.71 1255.91,826.77 1165.35,826.77
Top Solder:
  region: 4104,1436 3990,1436 3990,1368 4104,1368
  rectangle: 3691,1368 3806,1436

## Text inside footprints (layer, text, board x,y; h text height)
FETA: Bottom Overlay "S1\D2" at 2550.76,2067.1 h40 r180; Bottom Overlay "G2" at 2550.76,2134.1 h40 r180; Bottom Overlay "S2" at 2547.24,2204.72 h40 r180; Bottom Overlay "G1" at 2550.76,1999.1 h40 r180; Bottom Overlay "D1" at 2550.76,1932.1 h40 r180
LED2: Top Overlay "+" at 299.08,2737.54 h40 r90
LED3: Top Overlay "+" at 299.08,2488.32 h40 r90
LED4: Top Overlay "+" at 299.08,2237.54 h40 r90
LED5: Top Overlay "+" at 299.08,1985.57 h40 r90
LED6: Top Overlay "+" at 299.08,1733.6 h40 r90
LED7: Top Overlay "+" at 299.08,1493.44 h40 r90
Q105A: Bottom Overlay "3" at 2630.91,1376.38 h40 r90; Bottom Overlay "2" at 2630.91,1476.38 h40 r90; Bottom Overlay "1" at 2630.91,1566.54 h40 r90
R114A: Bottom Overlay "1" at 2630.91,975.98 h40 r90; Bottom Overlay "2" at 2629.92,787.4 h40 r90